# Altium PCB SubsystemA.PcbDoc
Units mil, origin at the board's own origin, x right, y up, seen from the top; angles counter-clockwise.
Board outline 5050 x 1500 mil, 2 copper layers (Top Layer, Bottom Layer); 47 components, 28 nets, 118 pads, 4 vias.
Unrouted connection lines stored in the file: 15.
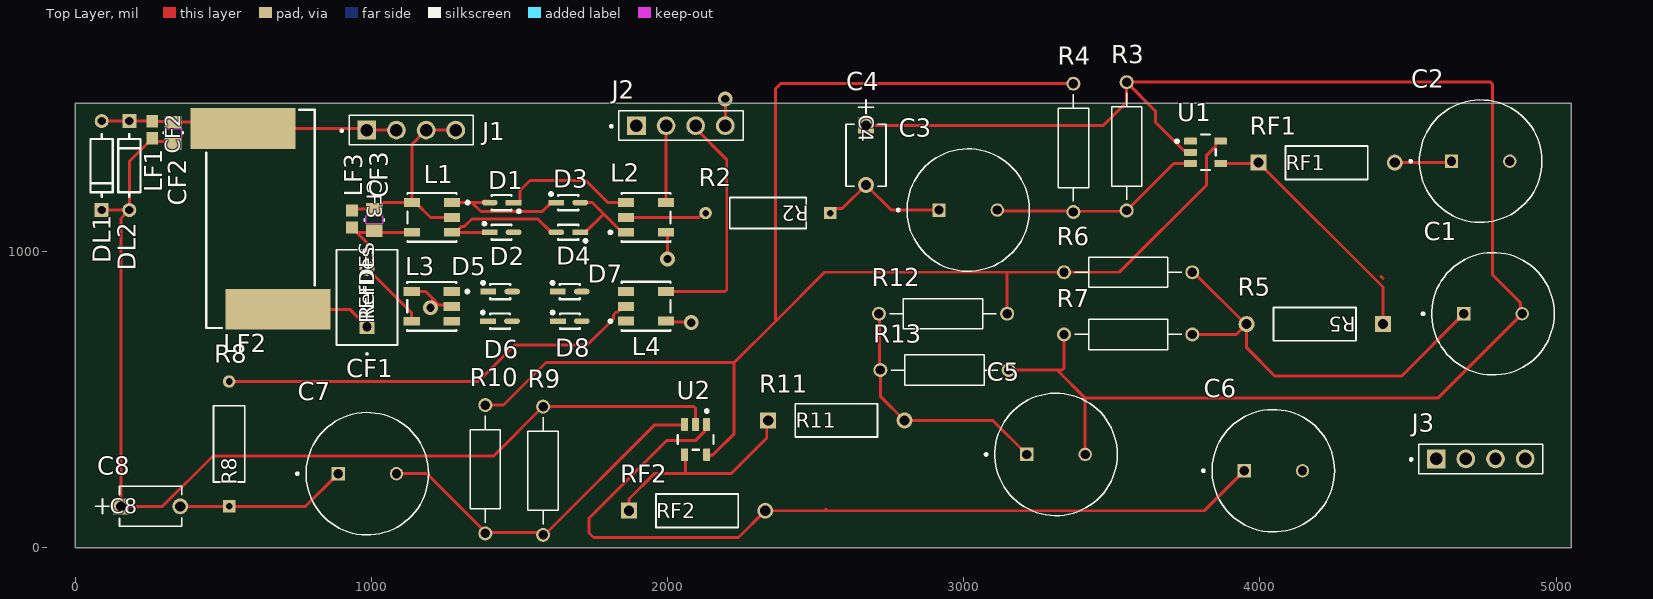
[diagram p0: Top Layer view]
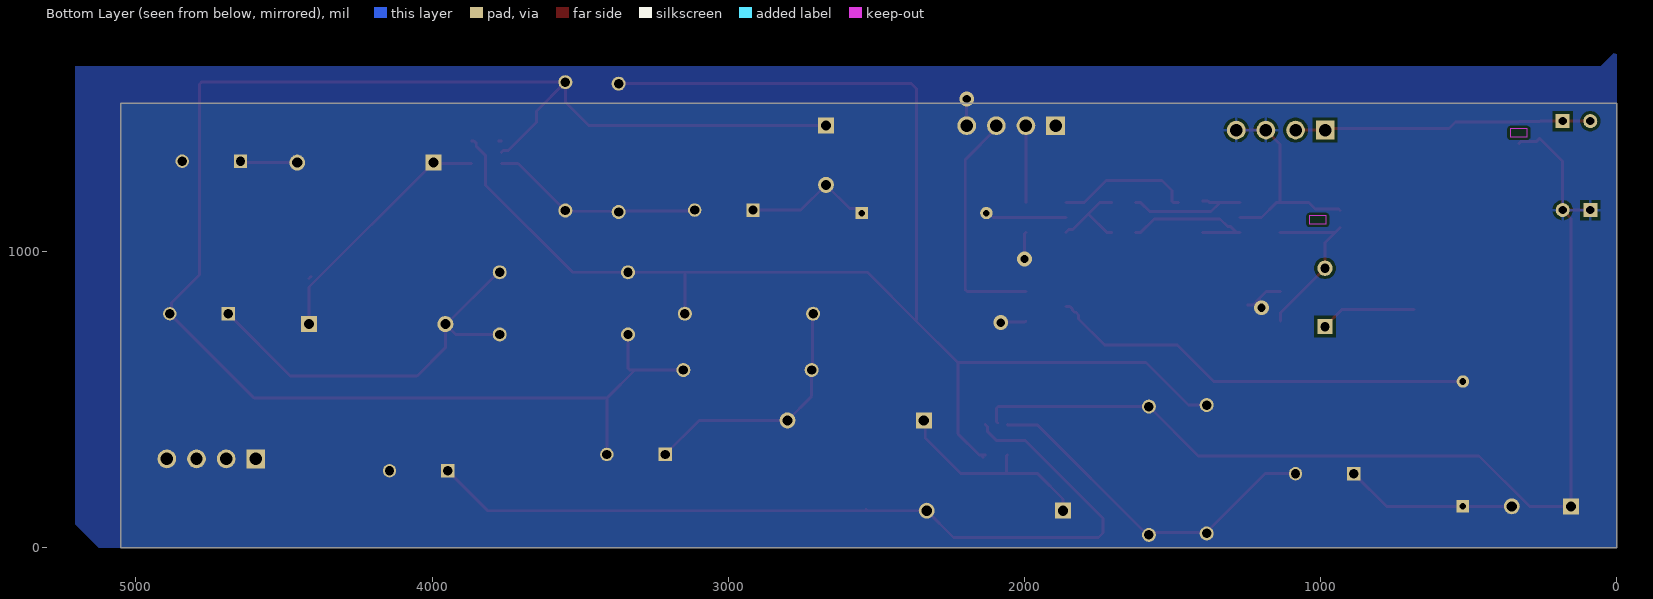
[diagram p1: Bottom Layer view, seen from below]

## Layer stack, top to bottom
Top Solder: solder mask 0.4, Solder Resist, Dk 3.5
Top Layer: signal copper 1.4
Dielectric 1: dielectric 12.6, FR-4, Dk 4.8
Bottom Layer: signal copper 1.4
Bottom Solder: solder mask 0.4, Solder Resist, Dk 3.5

## Board outline
0,0 5050,0 5050,1500 0,1500

## Design rules (kind name [scope] priority, off if disabled: settings)
Clearance [All] p1: gap=10 ignorepadtopadclearanceinfootprint=FALSE
PolygonConnect [All] p1: connectstyle=Relief reliefconductorwidth=10 reliefentries=4 polygonreliefangle="90 Angle" airgapwidth=10
RoutingVias [All] p1: holewidth=28 width=50 viastyle="Through Hole" minholewidth=28 minwidth=50 maxholewidth=28 maxwidth=50
SolderMaskExpansion [All] p1: expansion=4 istentingtop=FALSE
SupplyNets "Schematic Supply Nets_1" [InNet('+5')] p1: voltage=0.000
SupplyNets "Schematic Supply Nets" [InNet('GND')] p2: voltage=0.000
Width [All] p1: maxlimit=10 minlimit=10 preferedwidth=10
30 further rules are at their usual default settings.

## Components (designator, comment, footprint, x,y, rotation, side; value= is the part's Value field where it differs from the comment)
C1 "470uF" CAPPRD500W60D1050H2200 4786.57,790 r180 top
C2 "470uF" CAPPRD500W60D1050H2200 4745,1305 r180 top
C3 "470uF" CAPPRD500W60D1050H2200 3015,1140 r180 top
C4 "10nF" CAP_C322C511_MR_KEM 2670,1425 r270 top
C5 "470uF" CAPPRD500W60D1050H2200 3311.57,315 r180 top
C6 "470uF" CAPPRD500W60D1050H2200 4045,260 r180 top
C7 "470uF" CAPPRD500W60D1050H2200 986.57,250 r180 top
C8 "10nF" CAP_C322C511_MR_KEM 155,140 r0 top
CF1 "100pF" CAP_FKP20101001D00KSSD_WIM 985.54,746.83 r90 top
CF2 "390pF" CAP_J1_PAN 331.19,1400.61 r90 top
CF3 "390pF" CAP_J1_PAN 1010,1106.5 r270 top
D1 "BAT54WS-TP" FP-SOD-323-IPC_B 1440,1165 r180 top
D2 "BAT54WS-TP" FP-SOD-323-IPC_B 1440,1065 r0 top
D3 "BAT54WS-TP" FP-SOD-323-IPC_B 1665,1165 r0 top
D4 "BAT54WS-TP" FP-SOD-323-IPC_B 1665,1065 r180 top
D5 "BAT54WS-TP" FP-SOD-323-IPC_B 1435.38,865 r0 top
D6 "BAT54WS-TP" FP-SOD-323-IPC_B 1434.62,765 r0 top
D7 "BAT54WS-TP" FP-SOD-323-IPC_B 1670,865 r0 top
D8 "BAT54WS-TP" FP-SOD-323-IPC_B 1670.38,765 r0 top
DL1 "1N914B" FP-017AG-MFG 90,1290 r90 top value=4pF
DL2 "1N914B" FP-017AG-MFG 183.07,1290 r270 top value=4pF
J1 "PPTC041LFBN-RC" SULLINS_PPTC041LFBN-RC 1135,1410 r0 top
J2 "PPTC041LFBN-RC" SULLINS_PPTC041LFBN-RC 2045,1425 r0 top
J3 "PPTC041LFBN-RC" SULLINS_PPTC041LFBN-RC 4745,300 r0 top
L1 "MABAES0060" FP-MABAES0060-MFG 1205,1115 r0 top
L2 "MABAES0060" FP-MABAES0060-MFG 1927.48,1115 r180 top
L3 "MABAES0060" FP-MABAES0060-MFG 1203.99,814.76 r0 top
L4 "MABAES0060" FP-MABAES0060-MFG 1927.48,815 r180 top
LF1 "500nH" INDC1608X100N 260.61,1410.72 r90 top
LF2 "1.96uH" 7847229020 625.94,1110.12 r270 top
LF3 "500nH" INDC1608X100N 935,1110 r270 top
R2 "165" RES_MFR25_6P3X2P4_YAG 2550,1130 r180 top
R3 "10k" RESAD1100W55L680D260 3550,1355 r90 top
R4 "10k" RESAD1100W55L680D260 3370,1350 r270 top
R5 "1k" YAG_MF25_YAG 4415,755 r180 top
R6 "10k" RESAD1100W55L680D260 3555,930 r180 top
R7 "10k" RESAD1100W55L680D260 3555,720 r0 top
R8 "165" RES_MFR25_6P3X2P4_YAG 520,140 r90 top
R9 "10k" RESAD1100W55L680D260 1580,260 r90 top
R10 "10k" RESAD1100W55L680D260 1385,265 r270 top
R11 "1k" YAG_MF25_YAG 2340,430 r0 top
R12 "10k" RESAD1100W55L680D260 2930,790 r180 top
R13 "10k" RESAD1100W55L680D260 2935,600 r0 top
RF1 "48.7k" YAG_MF25_YAG 3995,1300 r0 top
RF2 "48.7k" YAG_MF25_YAG 1870,125 r0 top
U1 "TL081IDT" FP-DBV0005A-MFG 3816.18,1335 r0 top
U2 "TL081IDT" FP-DBV0005A-MFG 2095,365 r270 top

## Footprints (in the part's own frame and the unit in brackets; to place one, negate y for a bottom-side part, rotate by r counter-clockwise, add the part's x,y. Pads: shape width x height; smd on the part's side, far side on the other; paste and mask are expansions set on the pad)
7847229020 [mm] "Rod Core Inductor SMT, body 18.1x9.3mm"
  rect 3.5x9 smd: 1(-7.75,-1.5) 2(7.75,1.5)
  silkscreen extent -9.35,-4.65 9.35,4.65, body extent -9.05,-4.57 9.05,4.57, height 10.03
CAP_C322C511_MR_KEM [mil]
  rect 54x54 hole 34 paste-99999 mask+0: 1(0,0)
  round 54 hole 34 paste-99999 mask+0: 2(200,0)
  silkscreen extent -87,-68 205,68
CAP_FKP20101001D00KSSD_WIM [mil]
  rect 52x52 / inner round 60 / far side rect 52x52 hole 32 paste-99999 mask+0: 1(0,0)
  round 52 / inner round 60 / far side round 52 hole 32 paste-99999 mask+0: 2(196.85,0)
  silkscreen extent -96,-102 259,103, body extent -58,-97 254,97, height 260
CAP_J1_PAN [mil]
  rect 42x57 smd paste+0 mask+0: 1(-36.5,0) 2(36.5,0)
  Top Layer keep-out region: -13.5,-26.5 -13.5,26.5 13.5,26.5 13.5,-26.5
  Keep-Out Layer region: -13.5,-28.5 -13.5,28.5 13.5,28.5 13.5,-28.5
  silkscreen extent -3,-34 3,34, body extent -44,-29 44,29, height 43
CAPPRD500W60D1050H2200 [mm]
  rect 1.15x1.15 / inner round 1.15 / far side rect 1.15x1.15 hole 0.8: 1(2.5,0)
  round 1.15 hole 0.8: 2(-2.5,0)
  silkscreen extent -5.25,-5.25 6.1,5.25
FP-017AG-MFG [mm]
  rect 1.2x1.2 hole 0.7 paste-2539.97 mask+0: 1(-3.813,0)
  round 1.2 hole 0.7 paste-2539.97 mask+0: 2(3.813,0)
  silkscreen extent -2.68,-0.95 2.68,0.95, body extent -4.51,-1.05 4.51,1.05, height 0.25
FP-DBV0005A-MFG [mm]
  rrect17% 1.1x0.6 smd paste+0 mask+0: 1(-1.3,0.95) 2(-1.3,0) 3(-1.3,-0.95) 4(1.3,-0.95) 5(1.3,0.95)
  silkscreen extent -2.57,-1.53 0.87,1.53, body extent -1.95,-1.78 1.95,1.78, height 0.25
FP-MABAES0060-MFG [mm]
  rect 1.4x0.76 smd paste+0 mask+0: 1(1.715,1.27) 2(1.715,0) 3(1.715,-1.27) 4(-1.715,-1.27) 5(-1.715,1.27)
  silkscreen extent -2.09,-2.09 3.18,2.09, body extent -2.51,-2.19 2.51,2.19, height 0.25
FP-SOD-323-IPC_B [mil]
  rect 53.35x18.73 smd paste+0 mask+0: 1(-40.38,0)
  rrect100% 53.35x18.73 smd paste+0 mask+0: 2(40.38,0)
  silkscreen extent -63,-26 33,34, body extent -77,-34 77,34, height 10
INDC1608X100N [mm]
  rect 1.06x1.02 smd: 1(-0.728,0) 2(0.728,0)
  body extent -0.8,-0.4 0.8,0.4, height 1
RES_MFR25_6P3X2P4_YAG [mil]
  rect 42x42 hole 22 paste-99999 mask+0: 1(0,0)
  round 42 hole 22 paste-99999 mask+0: 2(421.26,0)
  silkscreen extent 82,-52 340,53, body extent -6,-47 427,47, height 95
RESAD1100W55L680D260 [mm]
  round 1.2 hole 0.8: 1(-5.5,0) 2(5.5,0)
  silkscreen extent -4.58,-1.3 4.58,1.3, body extent -5.77,-1.2 5.77,1.2, height 2.4
SULLINS_PPTC041LFBN-RC [mm]
  rect 1.605x1.605 / inner round 1.605 / far side rect 1.605x1.605 hole 1.07: 1(-3.81,0)
  round 1.605 hole 1.07: 2(-1.27,0) 3(1.27,0) 4(3.81,0)
  silkscreen extent -6.06,-1.27 5.33,1.27, body extent -5.33,-1.27 5.33,1.27, height 8.51
YAG_MF25_YAG [mil]
  rect 54x54 hole 34 paste-99999 mask+0: 1(0,0)
  round 54 hole 34 paste-99999 mask+0: 2(460,0)
  silkscreen extent 91,-56 369,57, body extent -12,-51 472,51, height 103

## Part data
C1 C2 C3 C5 C6 C7: library part UPW1V471MPD, Package=None, Availability=Unavailable, MP=UPW1V471MPD, Price=None
C4 C8: library part C322C103K3G5TA, "No Description Available", Manufacturer_Name=Kemet, Copyright="Copyright (C) 2026 Ultra Librarian. All rights reserved.", Manufacturer_Part_Number=C322C103K3G5TA
CF1: library part FKP2O101001D00KSSD, "Description", Manufacturer_Name=Wima, Copyright="Copyright (C) 2025 Ultra Librarian. All rights reserved.", Manufacturer_Part_Number=FKP2O101001D00KSSD
CF2 CF3: library part ECH-U1H391GX5, "No Description Available", Manufacturer_Name=Panasonic, Copyright="Copyright (C) 2026 Ultra Librarian. All rights reserved.", Manufacturer_Part_Number=ECH-U1H391GX5
D1 D2 D3 D4 D5 D6 D7 D8: library part CMP-56206-000013-1, "DIODE SCHOTTKY 30V 200MA SOD323", Average Rectified Current=200mA, Capacitance=2pF, Forward Voltage=1V, Max Operating Temperature=125°C, Max Repetitive Reverse Voltage (Vrrm)=30V, Max Reverse Current=2uA, Max Reverse Leakage Current=500nA, Min Operating Temperature=-55°C, Package Quantity=1, Peak Non-Repetitive Surge Current=600mA, Power Dissipation=200mW, Current Rating=200mA, Element Configuration=Single, Forward Current=200mA, Height=1mm, Lead Free="Lead Free", Length=1.8mm, Max Forward Surge Current (Ifsm)=200mA, Max Reverse Voltage (DC)=30V, Mount="Surface Mount", Number of Pins=2, Output Current=200mA, Packaging="Tape and Reel", Polarity=Standard, Radiation Hardening=No, Reverse Recovery Time=5ns, RoHS Compliant=Yes, Voltage Rating (DC)=30V, Width=1.35mm
DL1 DL2: library part CMP-07163-000001-1, "DIODE GEN PURP 100V 200MA DO35", Capacitance=4pF, Forward Current=300mA, Manufacturer="ON Semiconductor", Max Junction Temp=+175°C, Max Repetitive Reverse Voltage=100V, Max Surge Forward Current=1A, Package=017AG, Peak Reverse Current=5uA, Temperature="-55°C to +175°C", Temperature Range Low=-55°C, Automotive=No, Category=Diode, ComponentLink2Description=Datasheet, ComponentLink2URL=https://www.onsemi.com/pub/Collateral/1N914-D.PDF, Device Class L1="Discrete Semiconductors", Device Class L2=Diodes, Device Class L3="Rectifier Diodes", Digikey Description="DIODE GEN PURP 100V 200MA DO35", Footprint Url=https://www.onsemi.com/pub/Collateral/017AG.PDF, Height=1.91mm, Lead Free=Yes, Manufacturer Part Number=1N914B, Mouser Description="Diodes - General Purpose, Power, Switching 100V Io/200mA BULK", Octopart=https://octopart.com/1n914b-on+semiconductor-84323163, Reverse Voltage=100V, RoHS=TRUE, Temperature Range High=+175°C
J1 J2 J3: "4 Position Header Connector 0.100 (2.54mm) Through Hole Tin", Package=None, Check_prices=https://www.snapeda.com/parts/PPTC041LFBN-RC/Sullins/view-part/?ref=eda, MF="Sullins Connector", MP=PPTC041LFBN-RC, SnapEDA_Link=https://www.snapeda.com/parts/PPTC041LFBN-RC/Sullins/view-part/?ref=snap
L1 L2 L3 L4: library part CMP-97513-000003-1, "BALUN 300KHZ-200MHZ 1:1 6SMD", Case/Package=SMD/SMT, Max DC Current=500mA, Max Operating Temperature=85°C, Min Operating Temperature=-40°C, Package Quantity=2000, Power Rating=500mW, Depth=3.81mm, Height=2.67mm, Insertion Loss=1.5dB, Lead Free="Lead Free", Lead/Base Style="Gull Wing", Length=3.81mm, Mount="Surface Mount", Number of Pins=5, Packaging="Tape and Reel", Radiation Hardening=No, Termination=SMD/SMT, Turns Ratio=1:1, Width=3.81mm
LF1 LF3: library part BRC1608TR50M6, "500 nH Unshielded Drum Core, Wirewound Inductor 1.05 A 90mOhm 0603 (1608 Metric)", Package="1608 Taiyo Yuden", Check_prices=https://www.snapeda.com/parts/BRC1608TR50M6/Taiyo+Yuden/view-part/?ref=eda, MF="Taiyo Yuden", MP=BRC1608TR50M6, SnapEDA_Link=https://www.snapeda.com/parts/BRC1608TR50M6/Taiyo+Yuden/view-part/?ref=snap
LF2: library part CMP-03913-112295598-3, "Inductor, 1.96Uh, Unshielded, 15A Rohs Compliant: Yes", Ambient Temperature Range High=110°C, Ambient Temperature Range Low=-40°C, Current Rating=15A, DC Resistance (DCR)=2.4mΩ, Inductance=1.96µH, Max Operating Temperature=150°C, Diameter=9.3mm, Height=10mm, Length=18mm, Min Operating Temperature=-40°C, Pin Length=5.5mm, RoHS=Compliant
R2 R8: library part MFR-25FRF52-165R, "No Description Available", Manufacturer_Name=Yageo, Copyright="Copyright (C) 2026 Ultra Librarian. All rights reserved.", Manufacturer_Part_Number=MFR-25FRF52-165R
R3 R4 R6 R7 R9 R10 R12 R13: library part MFR-25FRF52-10K, "10.5 kOhms Â±1% 0.25W, 1/4W Through Hole Resistor Axial - Metal Film", Package="RADIAL-2 YAGEO", Check_prices=https://www.snapeda.com/parts/MFR-25FRF52-10K/Yageo/view-part/?ref=eda, MF=Yageo, MP=MFR-25FRF52-10K, SnapEDA_Link=https://www.snapeda.com/parts/MFR-25FRF52-10K/Yageo/view-part/?ref=snap
R5 R11: library part MFR-25FRF52-1K, "Description", Manufacturer_Name=Yageo, Copyright="Copyright (C) 2025 Ultra Librarian. All rights reserved.", Manufacturer_Part_Number=MFR-25FRF52-1K
RF1 RF2: library part MFR-25FBF52-48K7, "No Description Available", Manufacturer_Name=Yageo, Copyright="Copyright (C) 2026 Ultra Librarian. All rights reserved.", Manufacturer_Part_Number=MFR-25FBF52-48K7
U1 U2: library part CMP-00370-145533195-1, "OPA863ADBVR Single-channel, high-precision, low-power, 105-MHz, 12-V RRIO voltage-feedback amplifier 5-SOT-23 -40 to 125", Ambient Temperature Range High=125°C, Case/Package=SOT-23, Input Bias Current=300nA, Input Offset Voltage (Vos)=10µV, Manufacturer Lifecycle Status=ACTIVE, Max Junction Temperature (Tj)=150°C, Max Supply Voltage=12.6V, Min Operating Temperature=-40°C, Min Supply Voltage=2.7V, Nominal Supply Current=800µA, Output Current per Channel=30mA, Voltage Gain=128dB, Bandwidth=105MHz, Height=1.45mm, Length=2.9mm, Lifecycle Status=Production, Max Operating Temperature=125°C, NexarPartId=145533195, Number of Channels=1, Number of Pins=5, Response Time=70ns, Thickness=1.2mm, Width=1.6mm

## Via types
v1: diameter 50, hole 28, Top Layer to Bottom Layer, 4 vias

## Nets (pads, with @x,y where several pads share a name; then routed paths per layer and width w, separated by ;. In a path a pad name is that pad's centre, name@x,y a point inside that pad or via, vN(x,y) a via of type N, cw(c..) or ccw(c..) an arc to the next point about the centre after c; other vN are vias at no path point)
+5: J3.2 R4.1 R6.2 R10.1 R12.1 U1.5 U2.5 | length 5213.8
  Top Layer w10: R10.1 1446.54,481.54 1590,625 2225,625 ; U2.5 2153.82,313.82 2225,385 2225,625 ; R12.1 3146.54,928.46 3145,930 ; R4.1 2381.54,1566.54 2365,1550 2365,770 2367.5,767.5 ; U1.5 3857.52,1372.4 3850.71,1365.59 3850.71,1355.75 3820,1325.04 3820,1225 3525,930 R6.2 3145,930 ; 2225,625 2367.5,767.5 ; 2367.5,767.5 2530,930 3145,930
GND: C1.2 C4.1 C5.2 C8.1 CF2.1 CF3.1 DL1.1 DL2.2 J1.3 J1.4 J2.4 J3.4 L1.2 L1.5 L2.5 L3.2 L3.5 L4.5 LF1.1 LF3.1 R3.2 R7.1 R9.2 R13.2 U1.2 U2.2 | length 10351.8
  Top Layer w10: DL1.1 DL2.2 ; CF2.1 323.19,1372.11 270.56,1372.11 LF1.1 260.61,1381.27 183.07,1303.73 DL2.2 ; LF3.1 939.34,1143 CF3.1 1017.5,1143 1039.5,1165 L1.5 ; L3.5 1183.97,864.76 1206.46,842.27 ; v1(1200,810) 1206.46,816.46 1206.46,842.27 ; L3.2@1247.72,819.78 1228.95,819.78 1206.46,842.27 ; L1.2 1200.08,1115 1150.08,1165 L1.5 ; J1.4 1205,1410 1200,1415 1195,1410 J1.3 1137.48,1362.48 L1.5 ; L4.5 1997.5,762.5 2077.5,762.5 v1(2080,760) ; L2.5 2000,1060 v1(2000,975) ; U2.2@2090,421.18 2095,426.18 2095,470 2088.46,476.54 R9.2 1413.46,310 465.6,310 295.6,140 C8.1 155,1111.81 DL2.2 ; J2.4 v1(2195,1515) ; C4.1 3470,1425 3550,1505 R3.2 ; R13.2 3315,600 ; R7.1 3338.46,605.86 3332.61,600 3315,600 ; C5.2@3410,315.16 3410,505 ; U1.2 3758.19,1341.81 3742.09,1341.81 3647.72,1436.18 3647.72,1473.82 R3.2 ; 3315,600 3410,505 ; 3410,505 4600,505 C1.2 4878.78,796.22 4878.78,827.64 4785,921.41 4785,1565.68 4779.14,1571.54 R3.2
NetC1_1: C1.1 R5.2 R6.1 R7.2 | length 1393.4
  Top Layer w10: R7.2 3920,720 R5.2 ; R6.1 3775.77,930 3950.77,755 R5.2 ; C1.1 4478.15,580 4050,580 3955,675 R5.2
NetC2_1: C2.1 RF1.2 U1.1 | length 203.5
  Top Layer w10: U1.1 U1.1@3774.84,1372.4 ; RF1.2 4641.57,1300 C2.1
NetC2_2: C2.2 J3.1
NetC3_1: C3.1 C4.2 R2.1 | length 441.1
  Top Layer w10: R2.1 2566,1146 2591,1146 C4.2 2755,1140 C3.1
NetC3_2: C3.2 R3.1 R4.2 U1.3 | length 722.3
  Top Layer w10: C3.2 3116.69,1136.73 3366.73,1136.73 R4.2 3372.5,1135.96 3547.5,1135.96 R3.1 3709.13,1297.6 U1.3
NetC5_1: C5.1 R11.2 R12.2 R13.1 | length 856.6
  Top Layer w10: R12.2 2715.96,787.5 2715.96,602.5 R13.1 2718.46,511.54 R11.2 3098.15,430 C5.1
NetC6_1: C6.1 RF2.2 U2.1 | length 2905.9
  Top Layer w10: U2.1 2125.59,409.37 2125.59,393.27 2093.96,361.63 1996.63,361.63 1735,100 1735,50 1750,35 2240,35 RF2.2 2530,125 ; 2535,130 2530,125 ; C6.1 3811.57,125 2530,125
NetC6_2: C6.2 J3.3
NetC7_1: C7.1 C8.2 R8.1 | length 578.7
  Top Layer w10: C8.2 R8.1 778.15,140 C7.1
NetC7_2: C7.2 R9.1 R10.2 U2.3 | length 1208.4
  Top Layer w10: C7.2 1188.46,250 1385,53.46 1387.5,50.96 1587.5,50.96 1590,48.46 1956.54,415 2056.42,415 U2.3
NetCF1_1: CF1.1 LF2.2 | length 324.6
  Top Layer w10: LF2.2 927.37,805 CF1.1
NetCF1_2: CF1.2 CF3.2 L1.4 L3.4 LF3.2 | length 609
  Top Layer w10: LF3.2 LF3.2@935,1080.55 ; L3.4 1136.47,792.75 CF1.2 985.54,1030.01 LF3.2@935,1080.55 ; L1.4 951.34,1065 950.87,1065.47 950.08,1065.47 LF3.2@935,1080.55
NetCF2_2: CF2.2 DL1.2 DL2.1 J1.1 J1.2 LF1.2 LF2.1 | length 1007.9
  Top Layer w10: DL1.2 DL2.1 259.88,1440.12 LF1.2 328.92,1439.38 CF2.2 545.01,1437.11 LF2.1 575.24,1415.24 575,1415 980,1415 J1.1 J1.2
NetD1_1: D1.1 D2.2 L2.2 L2.3 R2.2 | length 738.3
  Top Layer w10: D1.1 1497.68,1165 1502.05,1169.37 1502.05,1206.19 1535.86,1240 1723.7,1240 1798.7,1165 L2.3 ; L2.2 2105.08,1115 2120.08,1130 R2.2
NetD1_2: D1.2 D3.1 L1.1 | length 438.7
  Top Layer w10: L1.1 1340,1165 ; D1.2@1399.62,1170 1379.95,1170 1374.95,1165 1340,1165 ; D3.1 1607.32,1165 1577.32,1135 1370,1135 1340,1165
NetD2_1: D2.1 D4.2 L1.3 | length 516.5
  Top Layer w10: D2.1 L1.3 1285.12,1065 1305.16,1085.04 1315.04,1085.04 1340,1110 1562.32,1110 1607.32,1065 D4.2
NetD3_2: D3.2 D4.1 L2.1 | length 302.8
  Top Layer w10: D4.1 1722.68,1065 1783.12,1125.43 1786.62,1125.43 ; D3.2 1747.05,1165 1786.62,1125.43 ; L2.1 1850,1074.96 1836.27,1074.96 1786.62,1124.61 1786.62,1125.43
NetD5_1: D5.1 D6.2 L4.3
NetD5_2: D5.2 D7.1 L3.1
NetD6_1: D6.1 D8.2 L3.3
NetD7_2: D7.2 D8.1 L4.1
NetJ2_2: J2.2 L2.4 | length 260
  Top Layer w10: L2.4 J2.2
NetJ2_3: J2.3 L4.4 | length 805.1
  Top Layer w10: L4.4 2194.14,865 2200,870.86 2200,1310 2095,1415 J2.3
NetL4_2: L4.2 R8.2 | length 1455.6
  Top Layer w10: R8.2 1361.26,561.26 1485,685 1729.96,685 1817.4,772.44 1817.4,786.17 1826.19,794.96 1831.54,794.96 1837.4,800.82 1837.4,805.04 1847.36,815 L4.2
NetR5_1: R5.1 RF1.1 U1.4 | length 855.9
  Top Layer w10: U1.4 3992.6,1297.6 RF1.1 4415,880 R5.1 ; 4409.14,915 4415,909.14
NetR11_1: R11.1 RF2.1 U2.4 | length 716.3
  Top Layer w10: RF2.1 1870,165 1955,250 2060,250 ; U2.4 2060,311.42 2060,250 ; R11.1 2335,425 2335,370.86 2214.14,250 2060,250
pads on no net: J2.1
copper on no net: | length 7.1
  Top Layer w10: 2140,305 2145,310

## Polygon pours and split planes (outlines as drawn)
GND on Bottom Layer "GND_L02_P000" (solid, pour order 0): 0,1680 55,1625 5205,1625 5205,80 5125,0 0,0 0,1675

## Text inside footprints (layer, text, board x,y; h text height)
CF1: Top Overlay "REFDES" at 1010.54,757.76 h50 r90; Top Overlay "RefDes" at 1010.54,770.26 h50 r90; Mechanical 13 "RefDes2" at 1010.54,757.76 h50 r90